# EAGLE board Vernier_Interface_Shield-Panel-v10 (EAGLE 6.5.0)
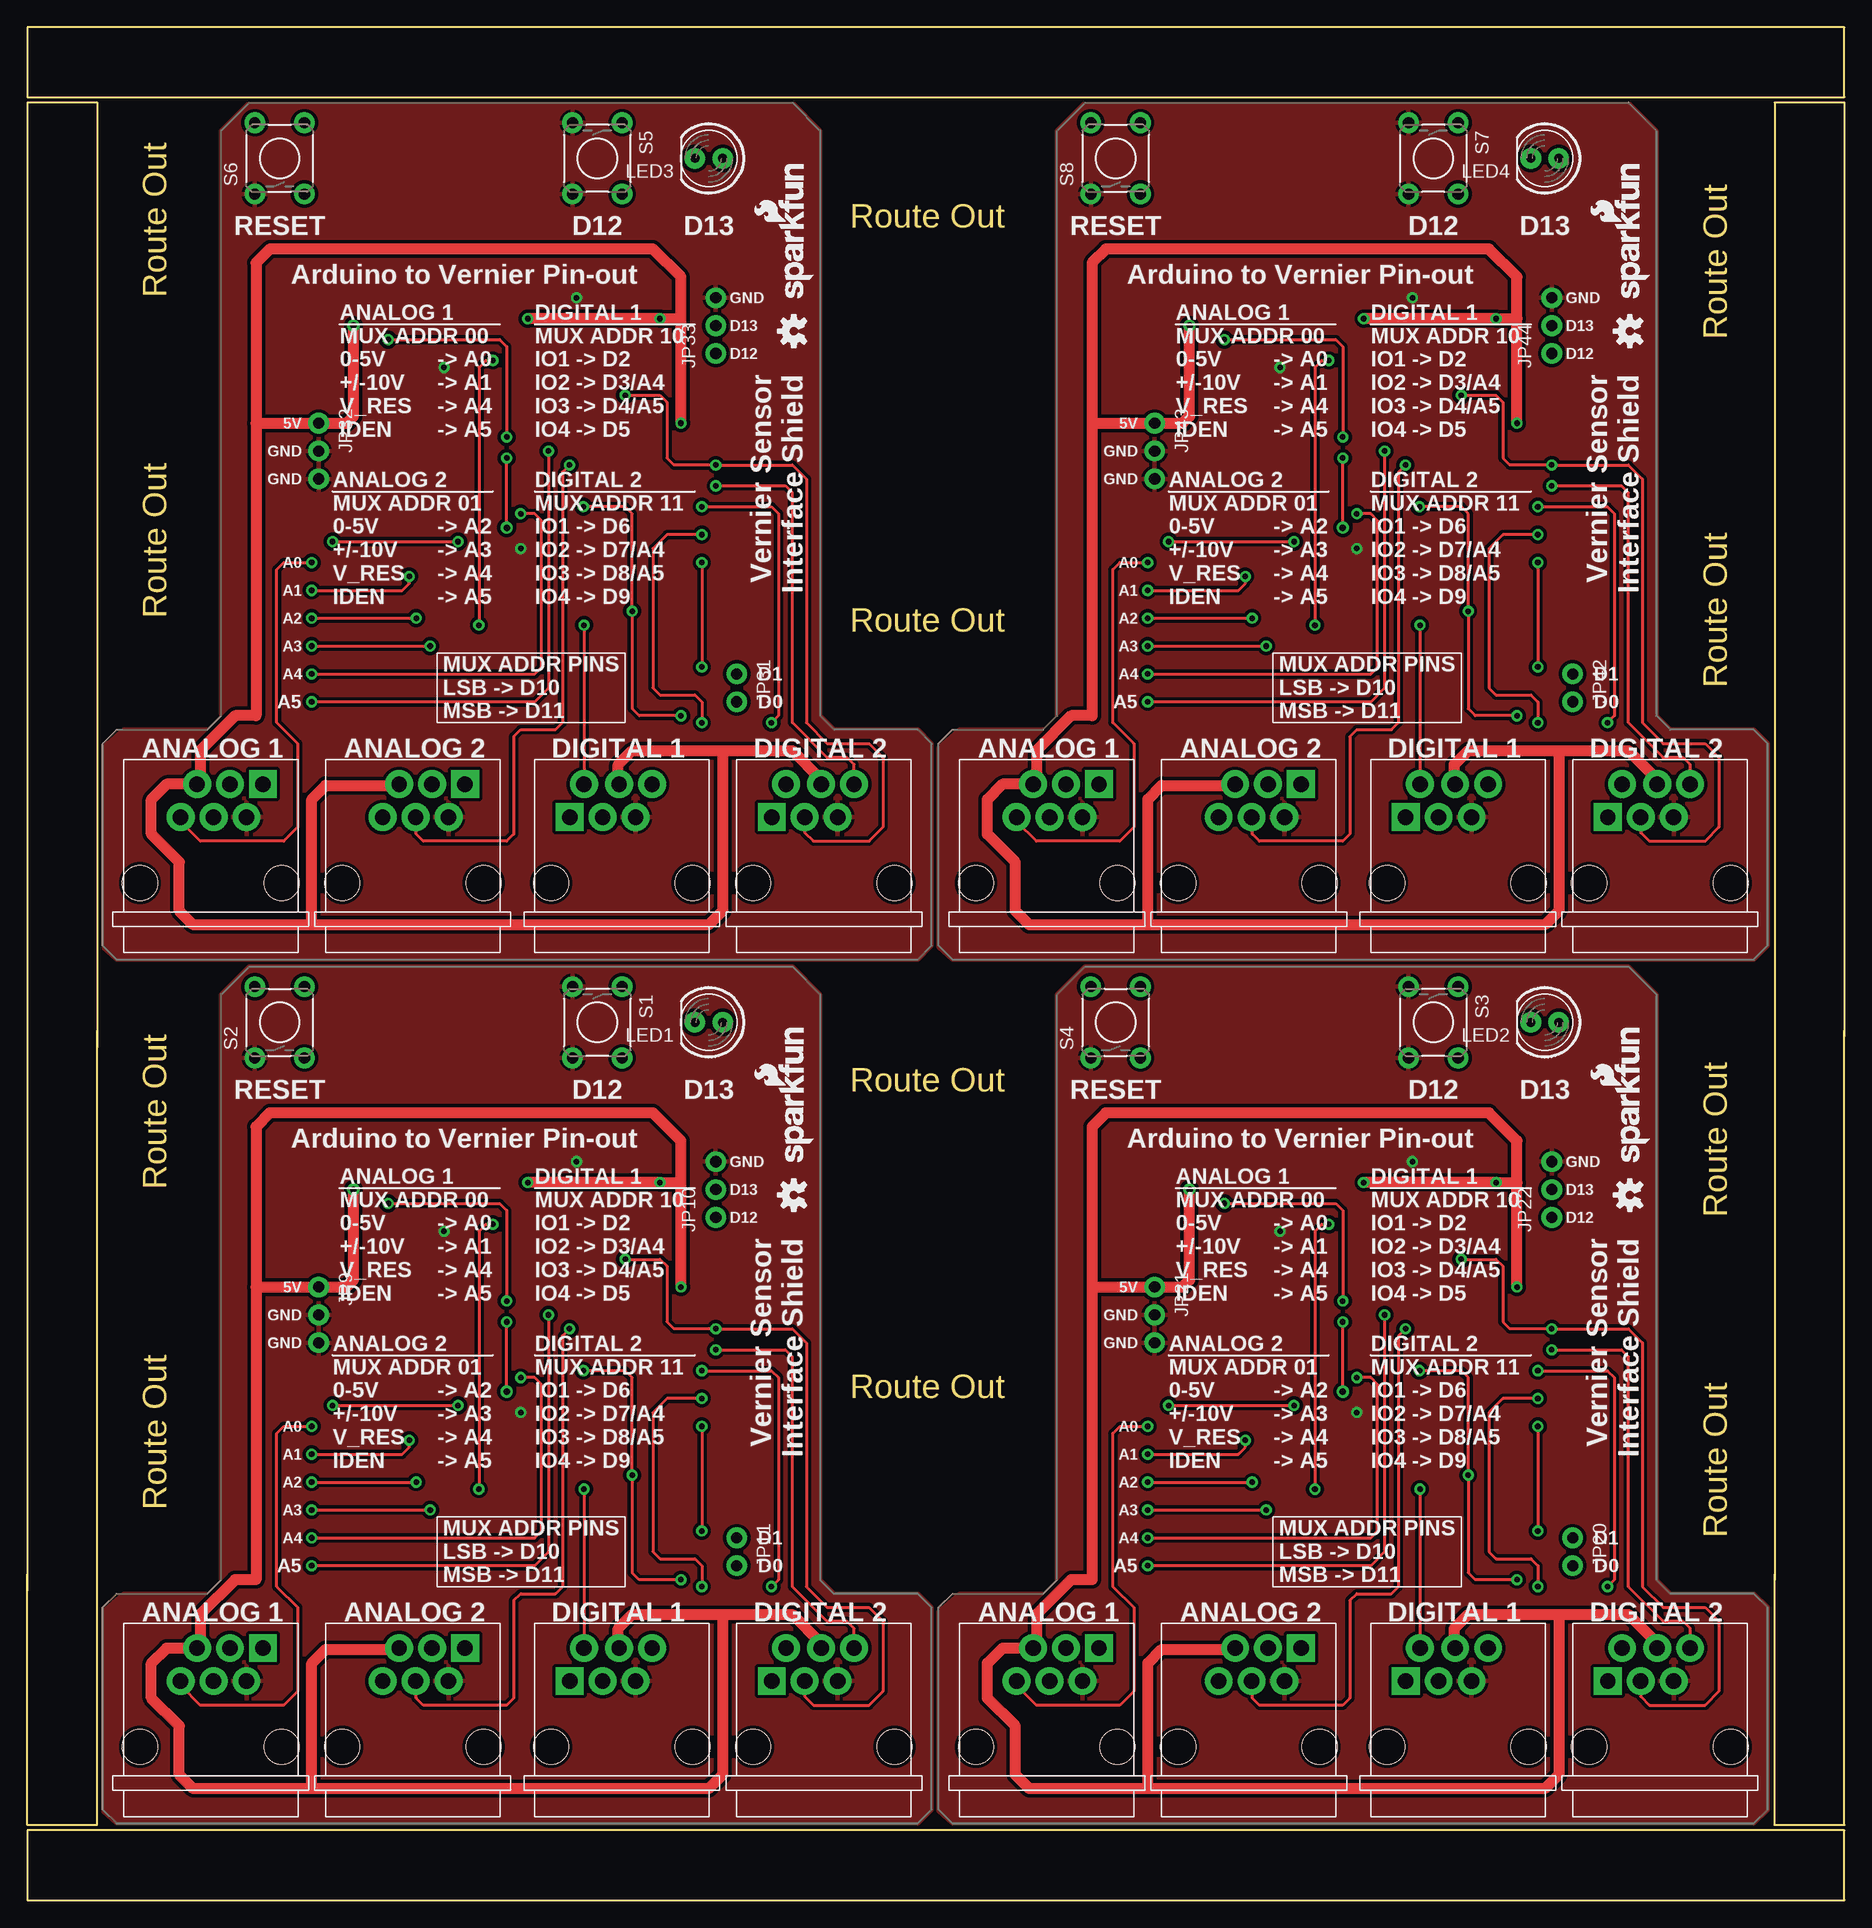
[diagram p0: board, top side]
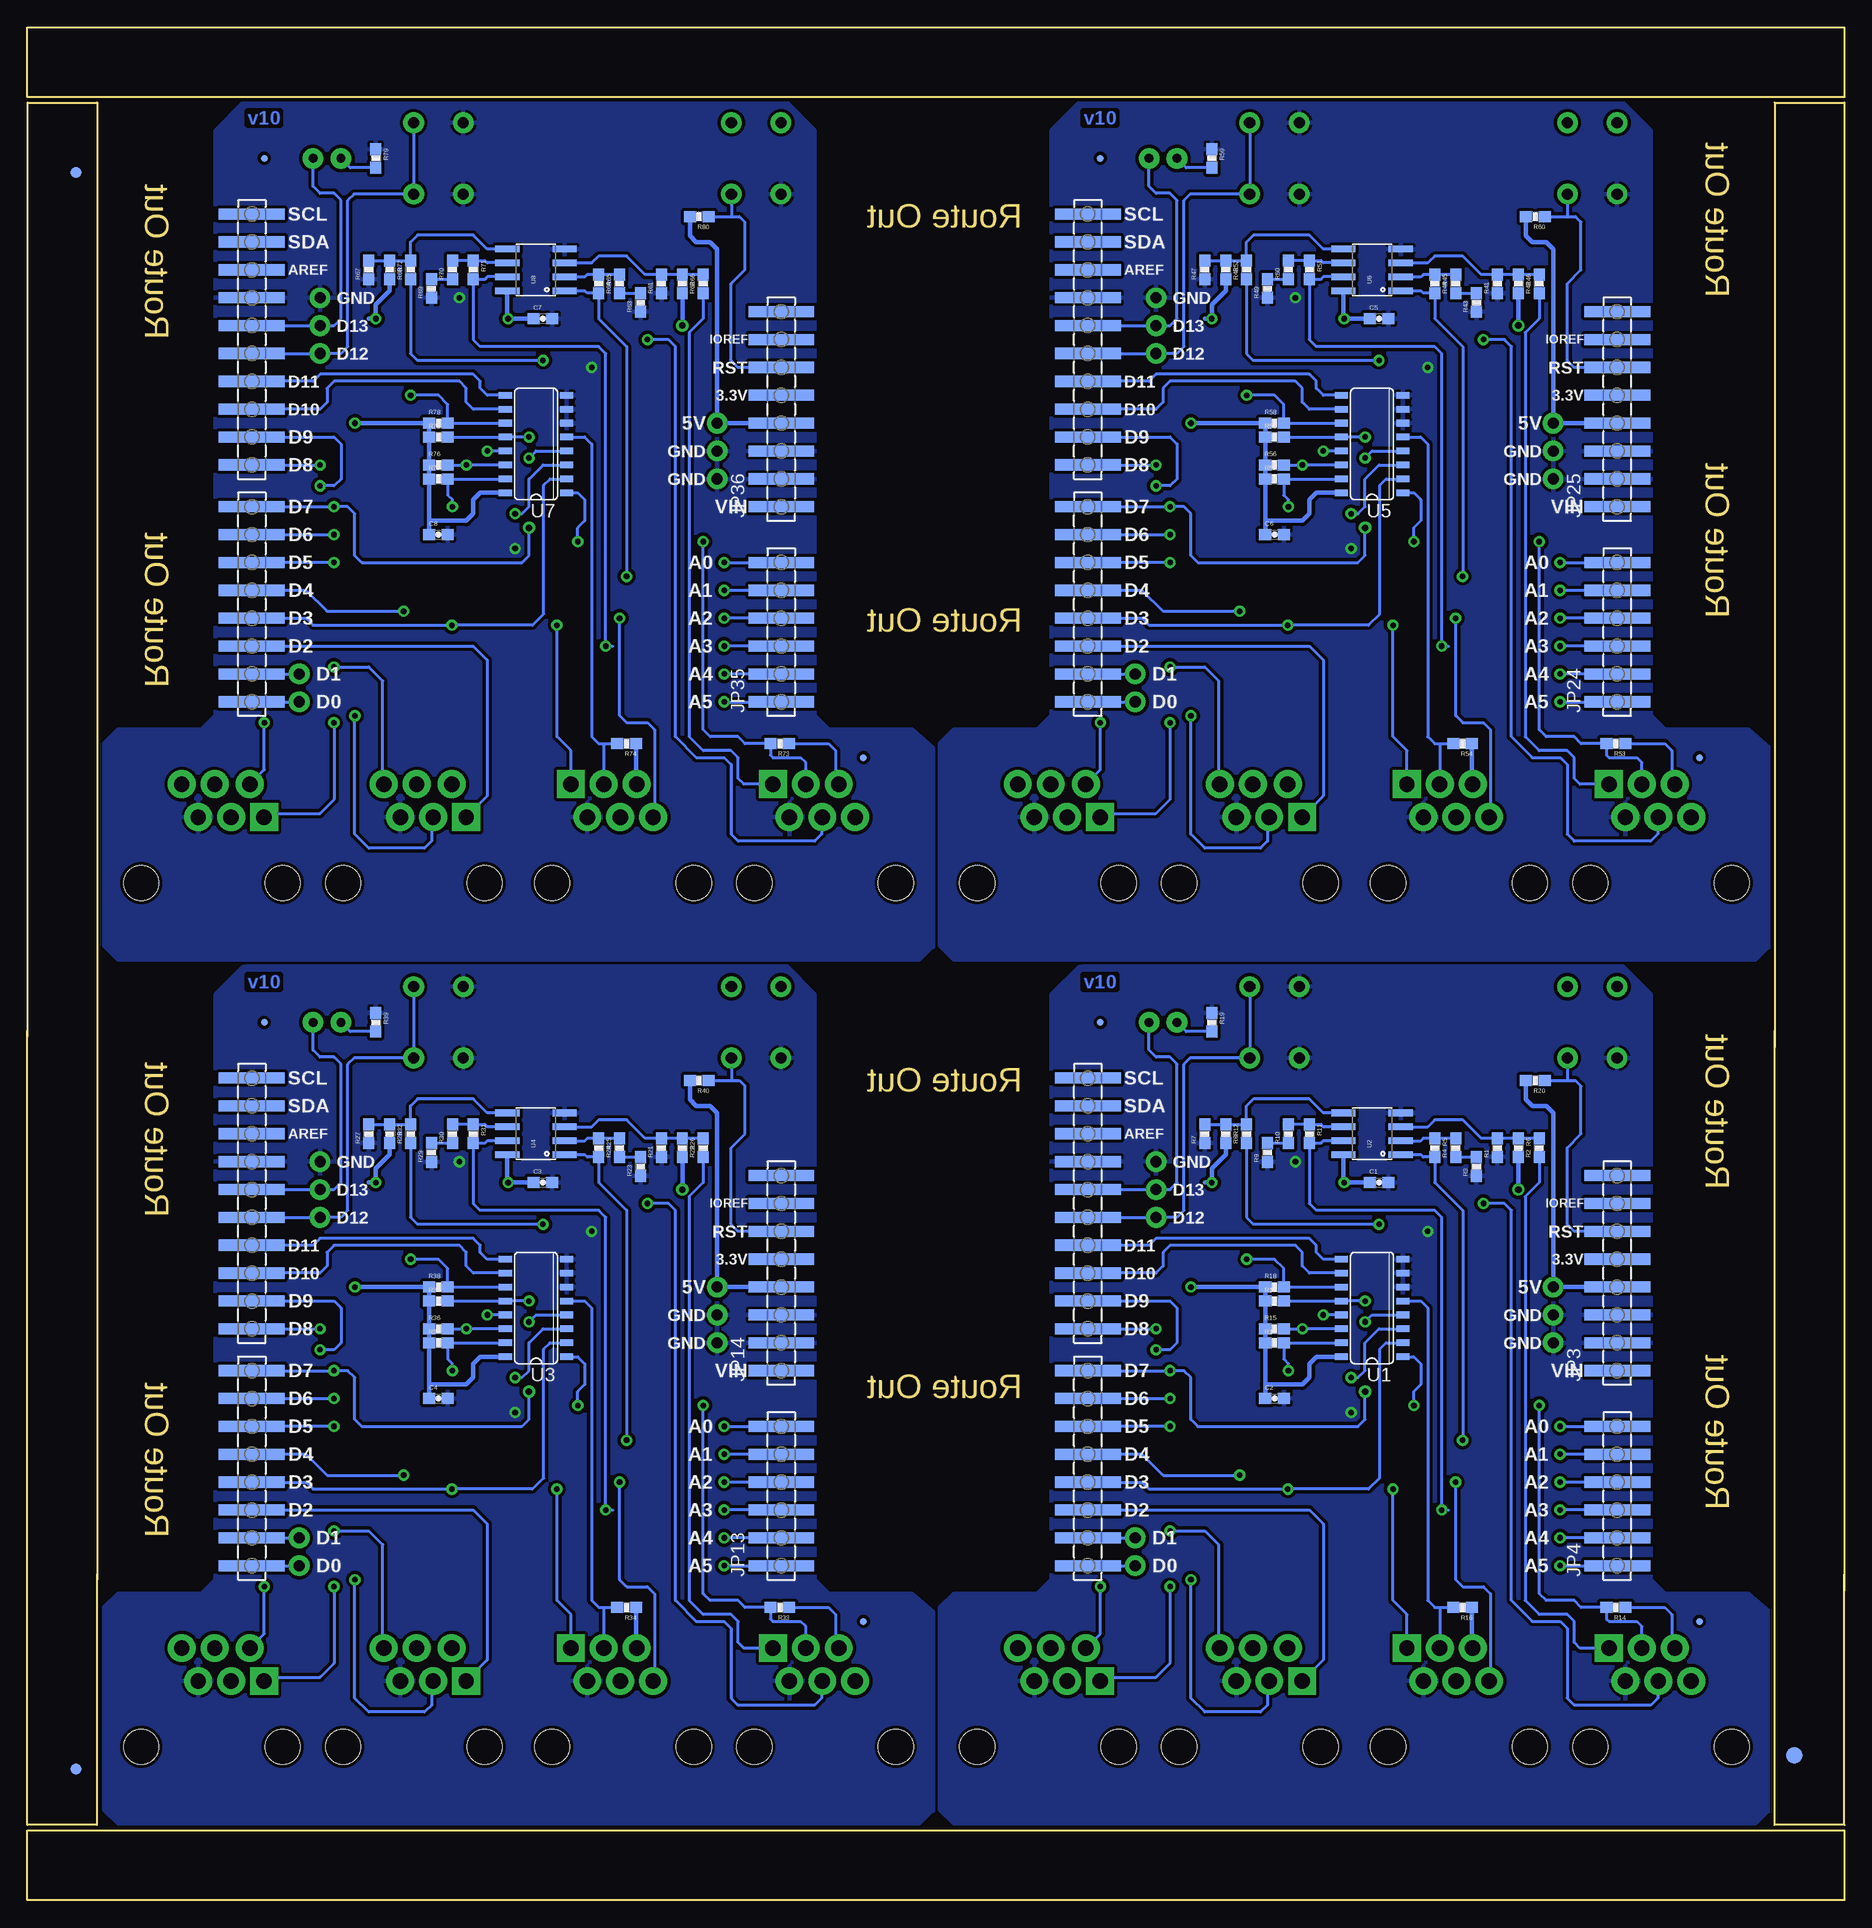
[diagram p1: board, bottom side, seen from below]

Size 165.61 x 170.69 mm. Coordinates in mm from the lower left corner, seen from the top.
Outline: 6.35,79.25 6.35,6.86 0,6.86 0,29.72
Outline: 165.61,79.25 165.61,6.86 159.26,6.86 159.26,29.72
Outline: 0,28.19 0,163.83 6.35,163.83 6.35,77.72
Outline: 159.26,29.21 159.26,163.83 165.61,163.83 165.61,78.74
Outline: 0,0 165.61,0 165.61,6.35 0,6.35 0,0
Outline: 0,164.34 165.61,164.34 165.61,170.69 0,170.69 0,164.34
Copper layers (1*16): Top 0.035mm / dielectric 1.5mm / Bottom 0.035mm
Design rules "SparkFun *": minimum track width 8mil, minimum drill 20mil, track to track 8mil, track to pad 8mil, pad to pad 8mil, via to via 8mil, smd to smd 8mil, copper to edge 8mil, drill to drill 8mil, minimum pad ring 12mil, minimum via ring 10mil, stop-mask expansion 4mil, vias tented up to drill 20mil, thermal gap 10mil

## Footprints (pad centres in the part's own frame; a part is rotated, then mirrored left to right if it is on the bottom)
0603-CAP = smd 1.1 x 1: 1 -0.85,0; 2 0.85,0
FIDUCIAL-1.5X3 = smd 1.5 x 1.5: 1 0,0
FIDUCIAL-1X2 = smd 1 x 1: 1 0,0
MICRO-FIDUCIAL = smd 0.635 x 0.635: 1 0,0
1X10_SMD_MALE = smd 1.02 x 6: 1 0,0; 2 2.54,0; 3 5.08,0; 4 7.62,0; 5 10.16,0; 6 12.7,0; 7 15.24,0; 8 17.78,0; 9 20.32,0; 10 22.86,0
1X08_SMD_MALE = smd 1.02 x 6: 1 0,0; 2 2.54,0; 3 5.08,0; 4 7.62,0; 5 10.16,0; 6 12.7,0; 7 15.24,0; 8 17.78,0
1X06_SMD_MALE = smd 1.02 x 6: 1 0,0; 2 2.54,0; 3 5.08,0; 4 7.62,0; 5 10.16,0; 6 12.7,0
BTA = drill 1.4 pad 2.54 square: 1 12.7,15.35 | drill 1.4 pad 2.54: 2 11.2,12.35; 3 9.7,15.35; 4 8.2,12.35; 5 6.7,15.35; 6 5.2,12.35 | hole 3.2: 14.4,6.35; 1.5,6.35
BTD = drill 1.4 pad 2.54 square: 1 3.2,12.35 | drill 1.4 pad 2.54: 2 4.5,15.35; 3 6.2,12.35; 4 7.7,15.35; 5 9.2,12.35; 6 10.7,15.35 | hole 3.2: 14.4,6.35; 1.5,6.35
1X03_NO_SILK = drill 1.016 pad 1.88: 1 0,0; 2 2.54,0; 3 5.08,0
1X02_NO_SILK = drill 1.016 pad 1.88: 1 0,0; 2 2.54,0
LED5MM = drill 0.813 pad 1.88: A -1.27,0; K 1.27,0
0603-RES = smd 1.1 x 1: 1 -0.85,0; 2 0.85,0
TACTILE-PTH = drill 1.016 pad 1.88: 1 -3.251,2.261; 2 3.251,2.261; 3 -3.251,-2.261; 4 3.251,-2.261
SO16 = smd 0.6 x 1.2: 1 -4.445,-2.8; 2 -3.175,-2.8; 3 -1.905,-2.8; 4 -0.635,-2.8; 5 0.635,-2.8; 6 1.905,-2.8; 7 3.175,-2.8; 8 4.445,-2.8; 9 4.445,2.8; 10 3.175,2.8; 11 1.905,2.8; 12 0.635,2.8; 13 -0.635,2.8; 14 -1.905,2.8; 15 -3.175,2.8; 16 -4.445,2.8
SO08 = smd 0.61 x 2.21: 1 -1.905,-2.616; 2 -0.635,-2.616; 3 0.635,-2.616; 4 1.905,-2.616; 5 1.905,2.616; 6 0.635,2.616; 7 -0.635,2.616; 8 -1.905,2.616

## Placement (x,y rotation side)
C1  0.1uF  [0603-CAP]  42.42,65.41 0 bottom
C2  0.1uF  [0603-CAP]  51.94,45.72 0 bottom
C3  0.1uF  [0603-CAP]  118.62,65.41 0 bottom
C4  0.1uF  [0603-CAP]  128.14,45.72 0 bottom
C5  0.1uF  [0603-CAP]  42.42,144.15 0 bottom
C6  0.1uF  [0603-CAP]  51.94,124.46 0 bottom
C7  0.1uF  [0603-CAP]  118.62,144.15 0 bottom
C8  0.1uF  [0603-CAP]  128.14,124.46 0 bottom
E$1  [FIDUCIAL-1.5X3]  4.57,13.21 90 bottom
E$4  [FIDUCIAL-1X2]  161.16,11.94 0 bottom
E$8  [FIDUCIAL-1X2]  161.16,157.48 180 bottom
FID1  FIDUCIALUFIDUCIAL  [MICRO-FIDUCIAL]  13.21,25.4 90 bottom
FID2  FIDUCIALUFIDUCIAL  [MICRO-FIDUCIAL]  67.82,80.01 0 bottom
FID3  FIDUCIALUFIDUCIAL  [MICRO-FIDUCIAL]  89.41,25.4 90 bottom
FID4  FIDUCIALUFIDUCIAL  [MICRO-FIDUCIAL]  144.02,80.01 0 bottom
FID5  FIDUCIALUFIDUCIAL  [MICRO-FIDUCIAL]  13.21,104.14 90 bottom
FID6  FIDUCIALUFIDUCIAL  [MICRO-FIDUCIAL]  67.82,158.75 0 bottom
FID7  FIDUCIALUFIDUCIAL  [MICRO-FIDUCIAL]  89.41,104.14 90 bottom
FID8  FIDUCIALUFIDUCIAL  [MICRO-FIDUCIAL]  144.02,158.75 0 bottom
JP1  Male  [1X10_SMD_MALE]  68.96,52.07 90 bottom
JP2  Male  [1X08_SMD_MALE]  68.96,30.48 90 bottom
JP3  Male  [1X08_SMD_MALE]  20.7,48.26 90 bottom
JP4  Male  [1X06_SMD_MALE]  20.7,30.48 90 bottom
JP5  BTA  [BTA]  8.76,7.62 0 top
JP6  BTA  [BTA]  27.18,7.62 0 top
JP7  BTD  [BTD]  46.23,7.62 0 top
JP8  BTD  [BTD]  64.64,7.62 0 top
JP9  [1X03_NO_SILK]  26.54,55.88 270 top
JP10  [1X03_NO_SILK]  62.74,62.23 90 top
JP11  M021X02_NO_SILK  [1X02_NO_SILK]  64.64,33.02 270 top
JP12  Male  [1X10_SMD_MALE]  145.16,52.07 90 bottom
JP13  Male  [1X06_SMD_MALE]  96.9,30.48 90 bottom
JP14  Male  [1X08_SMD_MALE]  96.9,48.26 90 bottom
JP15  Male  [1X08_SMD_MALE]  145.16,30.48 90 bottom
JP16  BTD  [BTD]  122.43,7.62 0 top
JP17  BTA  [BTA]  84.96,7.62 0 top
JP18  BTA  [BTA]  103.38,7.62 0 top
JP19  BTD  [BTD]  140.84,7.62 0 top
JP20  M021X02_NO_SILK  [1X02_NO_SILK]  140.84,33.02 270 top
JP21  [1X03_NO_SILK]  102.74,55.88 270 top
JP22  [1X03_NO_SILK]  138.94,62.23 90 top
JP23  Male  [1X10_SMD_MALE]  68.96,130.81 90 bottom
JP24  Male  [1X06_SMD_MALE]  20.7,109.22 90 bottom
JP25  Male  [1X08_SMD_MALE]  20.7,127 90 bottom
JP26  Male  [1X08_SMD_MALE]  68.96,109.22 90 bottom
JP27  BTD  [BTD]  46.23,86.36 0 top
JP28  BTA  [BTA]  8.76,86.36 0 top
JP29  BTA  [BTA]  27.18,86.36 0 top
JP30  BTD  [BTD]  64.64,86.36 0 top
JP31  M021X02_NO_SILK  [1X02_NO_SILK]  64.64,111.76 270 top
JP32  [1X03_NO_SILK]  26.54,134.62 270 top
JP33  [1X03_NO_SILK]  62.74,140.97 90 top
JP34  Male  [1X10_SMD_MALE]  145.16,130.81 90 bottom
JP35  Male  [1X06_SMD_MALE]  96.9,109.22 90 bottom
JP36  Male  [1X08_SMD_MALE]  96.9,127 90 bottom
JP37  Male  [1X08_SMD_MALE]  145.16,109.22 90 bottom
JP38  BTD  [BTD]  122.43,86.36 0 top
JP39  BTA  [BTA]  84.96,86.36 0 top
JP40  BTA  [BTA]  103.38,86.36 0 top
JP41  BTD  [BTD]  140.84,86.36 0 top
JP42  M021X02_NO_SILK  [1X02_NO_SILK]  140.84,111.76 270 top
JP43  [1X03_NO_SILK]  102.74,134.62 270 top
JP44  [1X03_NO_SILK]  138.94,140.97 90 top
LED1  [LED5MM]  62.1,80.01 180 top
LED2  [LED5MM]  138.3,80.01 180 top
LED3  [LED5MM]  62.1,158.75 180 top
LED4  [LED5MM]  138.3,158.75 180 top
LOGO1  OSHW-LOGOS  [OSHW-LOGO-S]  146.05,64.26 90 top
LOGO2  OSHW-LOGOS  [OSHW-LOGO-S]  69.85,64.26 90 top
LOGO3  OSHW-LOGOS  [OSHW-LOGO-S]  69.85,143 90 top
LOGO4  OSHW-LOGOS  [OSHW-LOGO-S]  146.05,143 90 top
LOGO_1  LOGO-SFESK  [SFE-LOGO-FLAME]  69.09,74.3 90 top
LOGO_2  LOGO-SFENW2  [SFE-NEW-WEB]  147.83,67.31 90 top
LOGO_3  LOGO-SFENW2  [SFE-NEW-WEB]  71.63,67.31 90 top
LOGO_4  LOGO-SFESK  [SFE-LOGO-FLAME]  145.29,74.3 90 top
LOGO_5  LOGO-SFENW2  [SFE-NEW-WEB]  71.63,146.05 90 top
LOGO_6  LOGO-SFESK  [SFE-LOGO-FLAME]  69.09,153.03 90 top
LOGO_7  LOGO-SFENW2  [SFE-NEW-WEB]  147.83,146.05 90 top
LOGO_8  LOGO-SFESK  [SFE-LOGO-FLAME]  145.29,153.03 90 top
R1  10K  [0603-RES]  31.62,68.58 90 bottom
R2  20k  [0603-RES]  27.81,68.58 90 bottom
R3  20k  [0603-RES]  33.53,66.88 90 bottom
R4  20k  [0603-RES]  35.43,68.58 90 bottom
R5  10K  [0603-RES]  37.34,68.58 270 bottom
R6  10K  [0603-RES]  29.72,68.58 270 bottom
R7  10K  [0603-RES]  58.29,69.85 90 bottom
R8  20k  [0603-RES]  54.48,69.85 90 bottom
R9  20k  [0603-RES]  52.58,68.15 90 bottom
R10  20k  [0603-RES]  50.67,69.85 90 bottom
R11  10K  [0603-RES]  48.77,69.85 270 bottom
R12  10K  [0603-RES]  56.39,69.85 270 bottom
R13  10K  [0603-RES]  51.94,54.61 0 bottom
R14  15K  [0603-RES]  20.83,26.67 180 bottom
R15  10K  [0603-RES]  51.94,52.07 0 bottom
R16  15K  [0603-RES]  34.8,26.67 180 bottom
R17  10K  [0603-RES]  51.94,50.8 0 bottom
R18  10K  [0603-RES]  51.94,55.88 0 bottom
R19  330  [0603-RES]  57.66,80.01 270 bottom
R20  10K  [0603-RES]  28.17,74.7 180 bottom
R21  10K  [0603-RES]  107.82,68.58 90 bottom
R22  20k  [0603-RES]  104.01,68.58 90 bottom
R23  20k  [0603-RES]  109.73,66.88 90 bottom
R24  20k  [0603-RES]  111.63,68.58 90 bottom
R25  10K  [0603-RES]  113.54,68.58 270 bottom
R26  10K  [0603-RES]  105.92,68.58 270 bottom
R27  10K  [0603-RES]  134.49,69.85 90 bottom
R28  20k  [0603-RES]  130.68,69.85 90 bottom
R29  20k  [0603-RES]  128.78,68.15 90 bottom
R30  20k  [0603-RES]  126.87,69.85 90 bottom
R31  10K  [0603-RES]  124.97,69.85 270 bottom
R32  10K  [0603-RES]  132.59,69.85 270 bottom
R33  15K  [0603-RES]  97.03,26.67 180 bottom
R34  15K  [0603-RES]  111,26.67 180 bottom
R35  10K  [0603-RES]  128.14,54.61 0 bottom
R36  10K  [0603-RES]  128.14,52.07 0 bottom
R37  10K  [0603-RES]  128.14,50.8 0 bottom
R38  10K  [0603-RES]  128.14,55.88 0 bottom
R39  330  [0603-RES]  133.86,80.01 270 bottom
R40  10K  [0603-RES]  104.37,74.7 180 bottom
R41  10K  [0603-RES]  31.62,147.32 90 bottom
R42  20k  [0603-RES]  27.81,147.32 90 bottom
R43  20k  [0603-RES]  33.53,145.62 90 bottom
R44  20k  [0603-RES]  35.43,147.32 90 bottom
R45  10K  [0603-RES]  37.34,147.32 270 bottom
R46  10K  [0603-RES]  29.72,147.32 270 bottom
R47  10K  [0603-RES]  58.29,148.59 90 bottom
R48  20k  [0603-RES]  54.48,148.59 90 bottom
R49  20k  [0603-RES]  52.58,146.89 90 bottom
R50  20k  [0603-RES]  50.67,148.59 90 bottom
R51  10K  [0603-RES]  48.77,148.59 270 bottom
R52  10K  [0603-RES]  56.39,148.59 270 bottom
R53  15K  [0603-RES]  20.83,105.41 180 bottom
R54  15K  [0603-RES]  34.8,105.41 180 bottom
R55  10K  [0603-RES]  51.94,133.35 0 bottom
R56  10K  [0603-RES]  51.94,130.81 0 bottom
R57  10K  [0603-RES]  51.94,129.54 0 bottom
R58  10K  [0603-RES]  51.94,134.62 0 bottom
R59  330  [0603-RES]  57.66,158.75 270 bottom
R60  10K  [0603-RES]  28.17,153.44 180 bottom
R61  10K  [0603-RES]  107.82,147.32 90 bottom
R62  20k  [0603-RES]  104.01,147.32 90 bottom
R63  20k  [0603-RES]  109.73,145.62 90 bottom
R64  20k  [0603-RES]  111.63,147.32 90 bottom
R65  10K  [0603-RES]  113.54,147.32 270 bottom
R66  10K  [0603-RES]  105.92,147.32 270 bottom
R67  10K  [0603-RES]  134.49,148.59 90 bottom
R68  20k  [0603-RES]  130.68,148.59 90 bottom
R69  20k  [0603-RES]  128.78,146.89 90 bottom
R70  20k  [0603-RES]  126.87,148.59 90 bottom
R71  10K  [0603-RES]  124.97,148.59 270 bottom
R72  10K  [0603-RES]  132.59,148.59 270 bottom
R73  15K  [0603-RES]  97.03,105.41 180 bottom
R74  15K  [0603-RES]  111,105.41 180 bottom
R75  10K  [0603-RES]  128.14,133.35 0 bottom
R76  10K  [0603-RES]  128.14,130.81 0 bottom
R77  10K  [0603-RES]  128.14,129.54 0 bottom
R78  10K  [0603-RES]  128.14,134.62 0 bottom
R79  330  [0603-RES]  133.86,158.75 270 bottom
R80  10K  [0603-RES]  104.37,153.44 180 bottom
S1  [TACTILE-PTH]  51.94,80.01 270 top
S2  [TACTILE-PTH]  22.99,80.01 90 top
S3  [TACTILE-PTH]  128.14,80.01 270 top
S4  [TACTILE-PTH]  99.19,80.01 90 top
S5  [TACTILE-PTH]  51.94,158.75 270 top
S6  [TACTILE-PTH]  22.99,158.75 90 top
S7  [TACTILE-PTH]  128.14,158.75 270 top
S8  [TACTILE-PTH]  99.19,158.75 90 top
U1  74HC4052SO  [SO16]  43.05,53.98 90 bottom
U2  LMV358  [SO08]  43.05,69.85 90 bottom
U3  74HC4052SO  [SO16]  119.25,53.98 90 bottom
U4  LMV358  [SO08]  119.25,69.85 90 bottom
U5  74HC4052SO  [SO16]  43.05,132.72 90 bottom
U6  LMV358  [SO08]  43.05,148.59 90 bottom
U7  74HC4052SO  [SO16]  119.25,132.72 90 bottom
U8  LMV358  [SO08]  119.25,148.59 90 bottom

## Library data of the parts
C1-C8 = SparkFun-Capacitors; PROD_ID: CAP-00810
E$1 E$4 E$8 FID1-FID8 LOGO1-LOGO4 LOGO_1-LOGO_8 = SparkFun-Aesthetics
JP1 JP12 JP23 JP34 = SparkFun-Connectors; PROD_ID: CONN-11291
JP2 JP3 JP14 JP15 JP25 JP26 JP36 JP37 = SparkFun-Connectors; PROD_ID: CONN-11292
JP4 JP13 JP24 JP35 = SparkFun-Connectors; PROD_ID: CONN-11293
JP5-JP11 JP16-JP22 JP27-JP33 JP38-JP44 = SparkFun-Connectors
LED1-LED4 = SparkFun-LED
R1 R5-R7 R11-R13 R15 R17 R18 R20 R21 R25-R27 R31 R32 R35-R38 R40 R41 R45-R47 R51 R52 R55-R58 R60 R61 R65-R67 R71 R72 R75-R78 R80 = SparkFun-Resistors; PROD_ID: RES-00824
R2-R4 R8-R10 R22-R24 R28-R30 R42-R44 R48-R50 R62-R64 R68-R70 = SparkFun-Resistors; PROD_ID: RES-09383
R14 R16 R33 R34 R53 R54 R73 R74 = SparkFun-Resistors; PROD_ID: RES-07854
R19 R39 R59 R79 = SparkFun-Resistors; PROD_ID: RES-00818
S1-S8 = SparkFun-Electromechanical
U1 U3 U5 U7 = SparkFun-AnalogIC; PROD_ID: IC-09813
U2 U4 U6 U8 = SparkFun-AnalogIC; PROD_ID: IC-09657

## Nets
0: JP2.1 JP11.2
1: JP2.2 JP11.1
2: JP12.5 JP22.1 S3.1 S3.2
3: JP15.1 JP20.2
3.3V: JP3.5
3.3V1: JP14.5
3.3V2: JP25.5
3.3V3: JP36.5
4: JP15.2 JP20.1
5: JP12.6 JP22.2 LED2.A
5V: C1.1 C2.1 JP3.4 JP5.5 JP6.5 JP7.4 JP8.4 JP9.1 R6.2 R12.2 R13.1 R14.1 R15.1 R16.1 R17.1 R18.1 R20.2 U1.16 U2.8
5V1: C3.1 C4.1 JP14.4 JP16.4 JP17.5 JP18.5 JP19.4 JP21.1 R26.2 R32.2 R33.1 R34.1 R35.1 R36.1 R37.1 R38.1 R40.2 U3.16 U4.8
5V2: C5.1 C6.1 JP25.4 JP27.4 JP28.5 JP29.5 JP30.4 JP32.1 R46.2 R52.2 R53.1 R54.1 R55.1 R56.1 R57.1 R58.1 R60.2 U5.16 U6.8
5V3: C7.1 C8.1 JP36.4 JP38.4 JP39.5 JP40.5 JP41.4 JP43.1 R66.2 R72.2 R73.1 R74.1 R75.1 R76.1 R77.1 R78.1 R80.2 U7.16 U8.8
6: JP23.5 JP33.1 S5.1 S5.2
7: JP26.1 JP31.2
8: JP26.2 JP31.1
9: JP23.6 JP33.2 LED3.A
10: JP34.5 JP44.1 S7.1 S7.2
11: JP37.1 JP42.2
12: JP1.5 JP10.1 S1.1 S1.2
13: JP1.6 JP10.2 LED1.A
14: JP37.2 JP42.1
15: JP34.6 JP44.2 LED4.A
A1: JP4.5 R5.2 U2.1
A2: JP13.2 U3.3
A3: JP4.3 R11.2 U2.7
A4: JP4.2 U1.3
A5: JP4.1 U1.13
A6: JP13.1 U3.13
A7: JP13.5 R25.2 U4.1
A8: JP13.3 R31.2 U4.7
A9: JP24.2 U5.3
A10: JP24.1 U5.13
A11: JP24.5 R45.2 U6.1
A12: JP24.3 R51.2 U6.7
A13: JP35.2 U7.3
A14: JP35.1 U7.13
A15: JP35.5 R65.2 U8.1
A16: JP35.3 R71.2 U8.7
AREF: JP1.8
AREF1: JP12.8
AREF2: JP23.8
AREF3: JP34.8
AS1_AN1: JP5.1 R2.1
AS1_AN2: JP4.6 JP5.6
AS1_AN3: JP17.1 R22.1
AS1_AN4: JP13.6 JP17.6
AS1_AN5: JP28.1 R42.1
AS1_AN6: JP24.6 JP28.6
AS1_AN7: JP39.1 R62.1
AS1_AN8: JP35.6 JP39.6
AS1_AUTOID: JP5.4 R13.2 U1.12
AS1_AUTOID1: JP17.4 R35.2 U3.12
AS1_AUTOID2: JP28.4 R55.2 U5.12
AS1_AUTOID3: JP39.4 R75.2 U7.12
AS1_VRES: JP5.3 R14.2 U1.1
AS1_VRES1: JP17.3 R33.2 U3.1
AS1_VRES2: JP28.3 R53.2 U5.1
AS1_VRES3: JP39.3 R73.2 U7.1
AS2_AN1: JP6.1 R8.1
AS2_AN2: JP4.4 JP6.6
AS2_AN3: JP13.4 JP18.6
AS2_AN4: JP18.1 R28.1
AS2_AN5: JP24.4 JP29.6
AS2_AN6: JP29.1 R48.1
AS2_AN7: JP35.4 JP40.6
AS2_AN8: JP40.1 R68.1
AS2_AUTOID: JP6.4 R15.2 U1.14
AS2_AUTOID1: JP18.4 R36.2 U3.14
AS2_AUTOID2: JP29.4 R56.2 U5.14
AS2_AUTOID3: JP40.4 R76.2 U7.14
AS2_VRES: JP6.3 R16.2 U1.5
AS2_VRES1: JP18.3 R34.2 U3.5
AS2_VRES2: JP29.3 R54.2 U5.5
AS2_VRES3: JP40.3 R74.2 U7.5
D1_IO1: JP2.3 JP7.1
D1_IO2: JP2.4 JP7.2 U1.2
D1_IO3: JP2.5 JP7.3 R17.2 U1.15
D1_IO4: JP2.6 JP7.6
D1_IO5: JP15.6 JP16.6
D1_IO6: JP15.5 JP16.3 R37.2 U3.15
D1_IO7: JP15.4 JP16.2 U3.2
D1_IO8: JP15.3 JP16.1
D1_IO9: JP26.6 JP27.6
D1_IO10: JP26.5 JP27.3 R57.2 U5.15
D1_IO11: JP26.4 JP27.2 U5.2
D1_IO12: JP26.3 JP27.1
D1_IO13: JP37.6 JP38.6
D1_IO14: JP37.5 JP38.3 R77.2 U7.15
D1_IO15: JP37.4 JP38.2 U7.2
D1_IO16: JP37.3 JP38.1
D2_IO1: JP2.7 JP8.1
D2_IO2: JP2.8 JP8.2 U1.4
D2_IO3: JP1.1 JP8.3 R18.2 U1.11
D2_IO4: JP1.2 JP8.6
D2_IO5: JP12.2 JP19.6
D2_IO6: JP12.1 JP19.3 R38.2 U3.11
D2_IO7: JP15.8 JP19.2 U3.4
D2_IO8: JP15.7 JP19.1
D2_IO9: JP23.2 JP30.6
D2_IO10: JP23.1 JP30.3 R58.2 U5.11
D2_IO11: JP26.8 JP30.2 U5.4
D2_IO12: JP26.7 JP30.1
D2_IO13: JP34.2 JP41.6
D2_IO14: JP34.1 JP41.3 R78.2 U7.11
D2_IO15: JP37.8 JP41.2 U7.4
D2_IO16: JP37.7 JP41.1
GND: C1.2 C2.2 JP1.7 JP3.2 JP3.3 JP5.2 JP6.2 JP7.5 JP8.5 JP9.2 JP9.3 JP10.3 R1.1 R3.1 R7.1 R9.1 R19.1 S1.3 S1.4 S2.1 U1.6 U1.7 U1.8 U2.4
GND1: C3.2 C4.2 JP12.7 JP14.2 JP14.3 JP16.5 JP17.2 JP18.2 JP19.5 JP21.2 JP21.3 JP22.3 R21.1 R23.1 R27.1 R29.1 R39.1 S3.3 S3.4 S4.1 U3.6 U3.7 U3.8 U4.4
GND2: C5.2 C6.2 JP23.7 JP25.2 JP25.3 JP27.5 JP28.2 JP29.2 JP30.5 JP32.2 JP32.3 JP33.3 R41.1 R43.1 R47.1 R49.1 R59.1 S5.3 S5.4 S6.1 U5.6 U5.7 U5.8 U6.4
GND3: C7.2 C8.2 JP34.7 JP36.2 JP36.3 JP38.5 JP39.2 JP40.2 JP41.5 JP43.2 JP43.3 JP44.3 R61.1 R63.1 R67.1 R69.1 R79.1 S7.3 S7.4 S8.1 U7.6 U7.7 U7.8 U8.4
IOREF: JP3.7
IOREF1: JP14.7
IOREF2: JP25.7
IOREF3: JP36.7
MUX_A0: JP1.3 U1.10
MUX_A1: JP1.4 U1.9
MUX_A2: JP12.3 U3.10
MUX_A3: JP12.4 U3.9
MUX_A4: JP23.3 U5.10
MUX_A5: JP23.4 U5.9
MUX_A6: JP34.3 U7.10
MUX_A7: JP34.4 U7.9
N$1: R1.2 R2.2 R6.1 U2.3
N$2: R3.2 R4.1
N$3: R4.2 R5.1 U2.2
N$4: R23.2 R24.1
N$5: R9.2 R10.1
N$6: R7.2 R8.2 R12.1 U2.5
N$8: R10.2 R11.1 U2.6
N$9: LED1.K R19.2
N$24: R21.2 R22.2 R26.1 U4.3
N$25: R24.2 R25.1 U4.2
N$26: R29.2 R30.1
N$28: R27.2 R28.2 R32.1 U4.5
N$29: R30.2 R31.1 U4.6
N$30: LED2.K R39.2
N$31: R43.2 R44.1
N$32: R41.2 R42.2 R46.1 U6.3
N$33: R44.2 R45.1 U6.2
N$34: R49.2 R50.1
N$35: R47.2 R48.2 R52.1 U6.5
N$36: R50.2 R51.1 U6.6
N$37: LED3.K R59.2
N$38: R63.2 R64.1
N$39: R61.2 R62.2 R66.1 U8.3
N$40: R64.2 R65.1 U8.2
N$41: R69.2 R70.1
N$42: R67.2 R68.2 R72.1 U8.5
N$43: R70.2 R71.1 U8.6
N$44: LED4.K R79.2
RESET: JP3.6 R20.1 S2.3
RESET1: JP14.6 R40.1 S4.3
RESET2: JP25.6 R60.1 S6.3
RESET3: JP36.6 R80.1 S8.3
SCL: JP1.10
SCL1: JP12.10
SCL2: JP23.10
SCL3: JP34.10
SDA: JP1.9
SDA1: JP12.9
SDA2: JP23.9
SDA3: JP34.9
VIN: JP3.1
VIN1: JP14.1
VIN2: JP25.1
VIN3: JP36.1

## Tracks (layer width: path | path; a pad name or v marks a point on that pad's centre or on a via)
0
  Bottom 0.254: JP2.1 JP11.2
1
  Bottom 0.254: JP2.2 JP11.1
2
  Bottom 0.254: S3.1 S3.2 135.84,76.76 136.4,76.2 136.4,62.87 137.03,62.23 JP22.1 JP12.5
3
  Bottom 0.254: JP15.1 JP20.2
4
  Bottom 0.254: JP15.2 JP20.1
5
  Bottom 0.254: JP12.6 JP22.2 137.67,64.77 137.03,65.41 137.03,76.2 137.67,76.83 138.94,76.83 139.57,77.47 LED2.A
5V  (via drill 0.51, 0.6)
  Top 1.016: 25.91,10.16 62.1,10.16 63.37,11.43 63.37,26.04 | 25.91,10.16 15.11,10.16 13.84,11.43 13.84,15.88 11.3,18.41 11.3,21.59 12.68,22.97 JP5.5 15.75,23.25 15.75,26.04 18.92,29.21 20.83,29.21 20.83,55.88 | 25.91,10.16 25.91,21.59 27.18,22.86 33.77,22.86 JP6.5 | v29.72,64.77 29.72,56.52 29.08,55.88 JP9.1 20.83,55.88 | 20.83,55.88 20.83,70.48 22.1,71.75 57.02,71.75 59.56,69.22 59.56,65.41 | v45.59,65.41 v57.66,65.41 59.56,65.41 | v59.56,55.88 59.56,65.41 | JP8.4 72.34,23.41 69.72,26.04 63.37,26.04 | JP7.4 53.85,23.05 53.85,24.77 55.12,26.04 63.37,26.04
  Bottom 0.254: JP6.5 33.95,23.04 | R14.1 16.38,26.67 15.75,26.04 15.75,23.25 JP5.5
  Bottom 0.406: 52.79,46.99 R17.1 R15.1 R13.1 R18.1 v59.56,55.88 | 52.79,46.99 C2.1 | U1.16 48.13,49.53 48.77,48.9 48.77,47.62 49.4,46.99 52.79,46.99 | 33.95,23.04 R16.1 | R6.2 v29.72,64.77 | C1.1 v45.59,65.41 45.67,65.48 U2.8 | JP3.4 JP9.1 26.54,71.75 27.18,72.39 28.45,72.39 29.02,72.97 R20.2 | 58.29,65.41 v57.66,65.41 57.66,66.67 56.39,67.94 R12.2
5V1  (via drill 0.51, 0.6)
  Top 1.016: 102.11,10.16 138.3,10.16 139.57,11.43 139.57,26.04 | 102.11,10.16 91.31,10.16 90.04,11.43 90.04,15.88 87.5,18.41 87.5,21.59 88.88,22.97 JP17.5 91.95,23.25 91.95,26.04 95.12,29.21 97.03,29.21 97.03,55.88 | 102.11,10.16 102.11,21.59 103.38,22.86 109.97,22.86 JP18.5 | v105.92,64.77 105.92,56.52 105.28,55.88 JP21.1 97.03,55.88 | 97.03,55.88 97.03,70.48 98.3,71.75 133.22,71.75 135.76,69.22 135.76,65.41 | v121.79,65.41 v133.86,65.41 135.76,65.41 | v135.76,55.88 135.76,65.41 | JP19.4 148.54,23.41 145.92,26.04 139.57,26.04 | JP16.4 130.05,23.05 130.05,24.77 131.32,26.04 139.57,26.04
  Bottom 0.254: JP18.5 110.15,23.04 | R33.1 92.58,26.67 91.95,26.04 91.95,23.25 JP17.5
  Bottom 0.406: 128.99,46.99 R37.1 R36.1 R35.1 R38.1 v135.76,55.88 | 128.99,46.99 C4.1 | U3.16 124.33,49.53 124.97,48.9 124.97,47.62 125.6,46.99 128.99,46.99 | 110.15,23.04 R34.1 | R26.2 v105.92,64.77 | C3.1 v121.79,65.41 121.87,65.48 U4.8 | JP14.4 JP21.1 102.74,71.75 103.38,72.39 104.65,72.39 105.22,72.97 R40.2 | 134.49,65.41 v133.86,65.41 133.86,66.67 132.59,67.94 R32.2
5V2  (via drill 0.51, 0.6)
  Top 1.016: 25.91,88.9 62.1,88.9 63.37,90.17 63.37,104.78 | 25.91,88.9 15.11,88.9 13.84,90.17 13.84,94.61 11.3,97.16 11.3,100.33 12.68,101.71 JP28.5 15.75,102 15.75,104.78 18.92,107.95 20.83,107.95 20.83,134.62 | 25.91,88.9 25.91,100.33 27.18,101.6 33.77,101.6 JP29.5 | v29.72,143.51 29.72,135.25 29.08,134.62 JP32.1 20.83,134.62 | 20.83,134.62 20.83,149.22 22.1,150.5 57.02,150.5 59.56,147.96 59.56,144.15 | v45.59,144.15 v57.66,144.15 59.56,144.15 | v59.56,134.62 59.56,144.15 | JP30.4 72.34,102.16 69.72,104.78 63.37,104.78 | JP27.4 53.85,101.79 53.85,103.5 55.12,104.78 63.37,104.78
  Bottom 0.254: JP29.5 33.95,101.78 | R53.1 16.38,105.41 15.75,104.78 15.75,102 JP28.5
  Bottom 0.406: 52.79,125.73 R57.1 R56.1 R55.1 R58.1 v59.56,134.62 | 52.79,125.73 C6.1 | U5.16 48.13,128.27 48.77,127.64 48.77,126.36 49.4,125.73 52.79,125.73 | 33.95,101.78 R54.1 | R46.2 v29.72,143.51 | C5.1 v45.59,144.15 45.67,144.22 U6.8 | JP25.4 JP32.1 26.54,150.5 27.18,151.13 28.45,151.13 29.02,151.71 R60.2 | 58.29,144.15 v57.66,144.15 57.66,145.41 56.39,146.69 R52.2
5V3  (via drill 0.51, 0.6)
  Top 1.016: 102.11,88.9 138.3,88.9 139.57,90.17 139.57,104.78 | 102.11,88.9 91.31,88.9 90.04,90.17 90.04,94.61 87.5,97.16 87.5,100.33 88.88,101.71 JP39.5 91.95,102 91.95,104.78 95.12,107.95 97.03,107.95 97.03,134.62 | 102.11,88.9 102.11,100.33 103.38,101.6 109.97,101.6 JP40.5 | v105.92,143.51 105.92,135.25 105.28,134.62 JP43.1 97.03,134.62 | 97.03,134.62 97.03,149.22 98.3,150.5 133.22,150.5 135.76,147.96 135.76,144.15 | v121.79,144.15 v133.86,144.15 135.76,144.15 | v135.76,134.62 135.76,144.15 | JP41.4 148.54,102.16 145.92,104.78 139.57,104.78 | JP38.4 130.05,101.79 130.05,103.5 131.32,104.78 139.57,104.78
  Bottom 0.254: JP40.5 110.15,101.78 | R73.1 92.58,105.41 91.95,104.78 91.95,102 JP39.5
  Bottom 0.406: 128.99,125.73 R77.1 R76.1 R75.1 R78.1 v135.76,134.62 | 128.99,125.73 C8.1 | U7.16 124.33,128.27 124.97,127.64 124.97,126.36 125.6,125.73 128.99,125.73 | 110.15,101.78 R74.1 | R66.2 v105.92,143.51 | C7.1 v121.79,144.15 121.87,144.22 U8.8 | JP36.4 JP43.1 102.74,150.5 103.38,151.13 104.65,151.13 105.22,151.71 R80.2 | 134.49,144.15 v133.86,144.15 133.86,145.41 132.59,146.69 R72.2
6
  Bottom 0.254: S5.1 S5.2 59.64,155.5 60.2,154.94 60.2,141.6 60.83,140.97 JP33.1 JP23.5
7
  Bottom 0.254: JP26.1 JP31.2
8
  Bottom 0.254: JP26.2 JP31.1
9
  Bottom 0.254: JP23.6 JP33.2 61.47,143.51 60.83,144.15 60.83,154.94 61.47,155.57 62.74,155.57 63.37,156.21 LED3.A
10
  Bottom 0.254: S7.1 S7.2 135.84,155.5 136.4,154.94 136.4,141.6 137.03,140.97 JP44.1 JP34.5
11
  Bottom 0.254: JP37.1 JP42.2
12
  Bottom 0.254: S1.1 S1.2 59.64,76.76 60.2,76.2 60.2,62.87 60.83,62.23 JP10.1 JP1.5
13
  Bottom 0.254: JP1.6 JP10.2 61.47,64.77 60.83,65.41 60.83,76.2 61.47,76.83 62.74,76.83 63.37,77.47 LED1.A
14
  Bottom 0.254: JP37.2 JP42.1
15
  Bottom 0.254: JP34.6 JP44.2 137.67,143.51 137.03,144.15 137.03,154.94 137.67,155.57 138.94,155.57 139.57,156.21 LED4.A
A1  (via drill 0.51)
  Top 0.254: v25.91,40.64 34.16,40.64 34.8,41.27 v34.8,41.91
  Bottom 0.254: v34.8,41.91 34.8,62.87 37.34,65.41 R5.2 38.39,67.73 38.61,67.94 U2.1 | JP4.5 v25.91,40.64
A2  (via drill 0.51)
  Top 0.254: v102.11,33.02 122.43,33.02 123.06,33.66 123.06,46.99 122.43,47.62 v121.16,47.62
  Bottom 0.254: JP13.2 v102.11,33.02 | v121.16,47.62 120.52,47.62 119.89,48.26 119.89,50.8 118.62,52.07 U3.3
A3  (via drill 0.51)
  Top 0.254: v25.91,35.56 v36.7,35.56
  Bottom 0.254: U2.7 47.5,69.22 47.71,69 R11.2 48.77,63.5 48.13,62.87 37.34,62.87 36.7,62.23 v36.7,35.56 36.07,35.56 | JP4.3 v25.91,35.56
A4  (via drill 0.51)
  Top 0.254: v25.91,33.02 46.23,33.02 46.86,33.66 46.86,46.99 46.23,47.62 v44.96,47.62
  Bottom 0.254: JP4.2 v25.91,33.02 | v44.96,47.62 44.32,47.62 43.69,48.26 43.69,50.8 42.42,52.07 U1.3
A5  (via drill 0.51)
  Top 0.254: v47.5,53.34 47.5,31.75 46.23,30.48 v25.91,30.48
  Bottom 0.254: U1.13 v47.5,53.34 | v25.91,30.48 JP4.1
A6  (via drill 0.51)
  Top 0.254: v123.7,53.34 123.7,31.75 122.43,30.48 v102.11,30.48
  Bottom 0.254: U3.13 v123.7,53.34 | v102.11,30.48 JP13.1
A7  (via drill 0.51)
  Top 0.254: v102.11,40.64 110.36,40.64 111,41.27 v111,41.91
  Bottom 0.254: v111,41.91 111,62.87 113.54,65.41 R25.2 114.59,67.73 114.81,67.94 U4.1 | JP13.5 v102.11,40.64
A8  (via drill 0.51)
  Top 0.254: v102.11,35.56 v112.9,35.56
  Bottom 0.254: U4.7 123.7,69.22 123.91,69 R31.2 124.97,63.5 124.33,62.87 113.54,62.87 112.9,62.23 v112.9,35.56 112.27,35.56 | JP13.3 v102.11,35.56
A9  (via drill 0.51)
  Top 0.254: v25.91,111.76 46.23,111.76 46.86,112.39 46.86,125.73 46.23,126.36 v44.96,126.36
  Bottom 0.254: JP24.2 v25.91,111.76 | v44.96,126.36 44.32,126.36 43.69,127 43.69,129.54 42.42,130.81 U5.3
A10  (via drill 0.51)
  Top 0.254: v47.5,132.08 47.5,110.49 46.23,109.22 v25.91,109.22
  Bottom 0.254: U5.13 v47.5,132.08 | v25.91,109.22 JP24.1
A11  (via drill 0.51)
  Top 0.254: v25.91,119.38 34.16,119.38 34.8,120.02 v34.8,120.65
  Bottom 0.254: v34.8,120.65 34.8,141.6 37.34,144.15 R45.2 38.39,146.47 38.61,146.69 U6.1 | JP24.5 v25.91,119.38
A12  (via drill 0.51)
  Top 0.254: v25.91,114.3 v36.7,114.3
  Bottom 0.254: U6.7 47.5,147.96 47.71,147.74 R51.2 48.77,142.24 48.13,141.6 37.34,141.6 36.7,140.97 v36.7,114.3 36.07,114.3 | JP24.3 v25.91,114.3
A13  (via drill 0.51)
  Top 0.254: v102.11,111.76 122.43,111.76 123.06,112.39 123.06,125.73 122.43,126.36 v121.16,126.36
  Bottom 0.254: JP35.2 v102.11,111.76 | v121.16,126.36 120.52,126.36 119.89,127 119.89,129.54 118.62,130.81 U7.3
A14  (via drill 0.51)
  Top 0.254: v123.7,132.08 123.7,110.49 122.43,109.22 v102.11,109.22
  Bottom 0.254: U7.13 v123.7,132.08 | v102.11,109.22 JP35.1
A15  (via drill 0.51)
  Top 0.254: v102.11,119.38 110.36,119.38 111,120.02 v111,120.65
  Bottom 0.254: v111,120.65 111,141.6 113.54,144.15 R65.2 114.59,146.47 114.81,146.69 U8.1 | JP35.5 v102.11,119.38
A16  (via drill 0.51)
  Top 0.254: v102.11,114.3 v112.9,114.3
  Bottom 0.254: U8.7 123.7,147.96 123.91,147.74 R71.2 124.97,142.24 124.33,141.6 113.54,141.6 112.9,140.97 v112.9,114.3 112.27,114.3 | JP35.3 v102.11,114.3
AS1_AN1
  Bottom 0.254: R2.1 27.81,65.41 29.08,64.14 29.08,27.3 27.81,26.04 25.27,26.04 24.64,25.4 24.64,23.5 24.11,22.97 JP5.1
AS1_AN2  (via drill 0.51)
  Top 0.254: v25.91,43.18 23.37,43.18 22.73,42.55 22.73,28.57 24.64,26.67 24.64,19.05 23.37,17.78 15.75,17.78 13.96,19.57 JP5.6
  Bottom 0.254: v25.91,43.18 JP4.6
AS1_AN3
  Bottom 0.254: R22.1 104.01,65.41 105.28,64.14 105.28,27.3 104.01,26.04 101.47,26.04 100.84,25.4 100.84,23.5 100.31,22.97 JP17.1
AS1_AN4  (via drill 0.51)
  Top 0.254: v102.11,43.18 99.57,43.18 98.93,42.55 98.93,28.57 100.84,26.67 100.84,19.05 99.57,17.78 91.95,17.78 90.16,19.57 JP17.6
  Bottom 0.254: v102.11,43.18 JP13.6
AS1_AN5
  Bottom 0.254: R42.1 27.81,144.15 29.08,142.88 29.08,106.05 27.81,104.78 25.27,104.78 24.64,104.14 24.64,102.23 24.11,101.71 JP28.1
AS1_AN6  (via drill 0.51)
  Top 0.254: v25.91,121.92 23.37,121.92 22.73,121.28 22.73,107.31 24.64,105.41 24.64,97.79 23.37,96.52 15.75,96.52 13.96,98.31 JP28.6
  Bottom 0.254: v25.91,121.92 JP24.6
AS1_AN7
  Bottom 0.254: R62.1 104.01,144.15 105.28,142.88 105.28,106.05 104.01,104.78 101.47,104.78 100.84,104.14 100.84,102.23 100.31,101.71 JP39.1
AS1_AN8  (via drill 0.51)
  Top 0.254: v102.11,121.92 99.57,121.92 98.93,121.28 98.93,107.31 100.84,105.41 100.84,97.79 99.57,96.52 91.95,96.52 90.16,98.31 JP39.6
  Bottom 0.254: v102.11,121.92 JP35.6
AS1_AUTOID  (via drill 0.51)
  Top 0.254: v32.89,63.5 43.05,63.5 43.69,62.87 v43.69,54.61
  Bottom 0.254: R13.2 U1.12 v43.69,54.61 | JP5.4 17.02,19.91 17.02,18.41 17.65,17.78 24.64,17.78 25.27,18.41 25.27,24.77 25.91,25.4 28.45,25.4 30.35,27.3 30.35,62.87 30.99,63.5 v32.89,63.5
AS1_AUTOID1  (via drill 0.51)
  Top 0.254: v109.09,63.5 119.25,63.5 119.89,62.87 v119.89,54.61
  Bottom 0.254: R35.2 U3.12 v119.89,54.61 | JP17.4 93.22,19.91 93.22,18.41 93.85,17.78 100.84,17.78 101.47,18.41 101.47,24.77 102.11,25.4 104.65,25.4 106.55,27.3 106.55,62.87 107.19,63.5 v109.09,63.5
AS1_AUTOID2  (via drill 0.51)
  Top 0.254: v32.89,142.24 43.05,142.24 43.69,141.6 v43.69,133.35
  Bottom 0.254: R55.2 U5.12 v43.69,133.35 | JP28.4 17.02,98.66 17.02,97.16 17.65,96.52 24.64,96.52 25.27,97.16 25.27,103.5 25.91,104.14 28.45,104.14 30.35,106.05 30.35,141.6 30.99,142.24 v32.89,142.24
AS1_AUTOID3  (via drill 0.51)
  Top 0.254: v109.09,142.24 119.25,142.24 119.89,141.6 v119.89,133.35
  Bottom 0.254: R75.2 U7.12 v119.89,133.35 | JP39.4 93.22,98.66 93.22,97.16 93.85,96.52 100.84,96.52 101.47,97.16 101.47,103.5 102.11,104.14 104.65,104.14 106.55,106.05 106.55,141.6 107.19,142.24 v109.09,142.24
AS1_VRES  (via drill 0.51)
  Top 0.254: v27.81,45.09 v39.24,45.09
  Bottom 0.254: JP5.3 18.46,24.94 18.92,25.4 21.46,25.4 21.68,25.61 R14.2 24,26.67 24.64,27.3 27.18,27.3 27.81,27.94 v27.81,45.09 | v39.24,45.09 39.24,46.35 38.61,46.99 38.61,48.9 39.24,49.53 U1.1
AS1_VRES1  (via drill 0.51)
  Top 0.254: v104.01,45.09 v115.44,45.09
  Bottom 0.254: JP17.3 94.66,24.94 95.12,25.4 97.66,25.4 97.88,25.61 R33.2 100.2,26.67 100.84,27.3 103.38,27.3 104.01,27.94 v104.01,45.09 | v115.44,45.09 115.44,46.35 114.81,46.99 114.81,48.9 115.44,49.53 U3.1
AS1_VRES2  (via drill 0.51)
  Top 0.254: v27.81,123.83 v39.24,123.83
  Bottom 0.254: JP28.3 18.46,103.68 18.92,104.14 21.46,104.14 21.68,104.36 R53.2 24,105.41 24.64,106.05 27.18,106.05 27.81,106.68 v27.81,123.83 | v39.24,123.83 39.24,125.09 38.61,125.73 38.61,127.64 39.24,128.27 U5.1
AS1_VRES3  (via drill 0.51)
  Top 0.254: v104.01,123.83 v115.44,123.83
  Bottom 0.254: JP39.3 94.66,103.68 95.12,104.14 97.66,104.14 97.88,104.36 R73.2 100.2,105.41 100.84,106.05 103.38,106.05 104.01,106.68 v104.01,123.83 | v115.44,123.83 115.44,125.09 114.81,125.73 114.81,127.64 115.44,128.27 U7.1
AS2_AN1  (via drill 0.51)
  Top 0.254: v41.15,37.47 41.15,60.96 41.78,61.59 v42.42,61.59
  Bottom 0.254: v42.42,61.59 53.85,61.59 54.48,62.23 R8.1 | JP6.1 39.88,26.04 41.15,27.3 v41.15,37.47
AS2_AN2  (via drill 0.51)
  Top 0.254: v25.91,38.1 v35.43,38.1
  Bottom 0.254: JP4.4 v25.91,38.1 | v35.43,38.1 35.43,29.21 34.8,28.57 32.89,28.57 32.26,27.94 32.26,20.09 JP6.6
AS2_AN3  (via drill 0.51)
  Top 0.254: v102.11,38.1 v111.63,38.1
  Bottom 0.254: JP13.4 v102.11,38.1 | v111.63,38.1 111.63,29.21 111,28.57 109.09,28.57 108.46,27.94 108.46,20.09 JP18.6
AS2_AN4  (via drill 0.51)
  Top 0.254: v117.35,37.47 117.35,60.96 117.98,61.59 v118.62,61.59
  Bottom 0.254: v118.62,61.59 130.05,61.59 130.68,62.23 R28.1 | JP18.1 116.08,26.04 117.35,27.3 v117.35,37.47
AS2_AN5  (via drill 0.51)
  Top 0.254: v25.91,116.84 v35.43,116.84
  Bottom 0.254: JP24.4 v25.91,116.84 | v35.43,116.84 35.43,107.95 34.8,107.31 32.89,107.31 32.26,106.68 32.26,98.83 JP29.6
AS2_AN6  (via drill 0.51)
  Top 0.254: v41.15,116.2 41.15,139.7 41.78,140.34 v42.42,140.34
  Bottom 0.254: v42.42,140.34 53.85,140.34 54.48,140.97 R48.1 | JP29.1 39.88,104.78 41.15,106.05 v41.15,116.2
AS2_AN7  (via drill 0.51)
  Top 0.254: v102.11,116.84 v111.63,116.84
  Bottom 0.254: JP35.4 v102.11,116.84 | v111.63,116.84 111.63,107.95 111,107.31 109.09,107.31 108.46,106.68 108.46,98.83 JP40.6
AS2_AN8  (via drill 0.51)
  Top 0.254: v117.35,116.2 117.35,139.7 117.98,140.34 v118.62,140.34
  Bottom 0.254: v118.62,140.34 130.05,140.34 130.68,140.97 R68.1 | JP40.1 116.08,104.78 117.35,106.05 v117.35,116.2
AS2_AUTOID  (via drill 0.51)
  Top 0.254: v49.4,52.07 48.77,51.44 48.77,28.57 48.13,27.94 44.96,27.94 44.32,27.3 44.32,18.41 43.69,17.78 36.07,17.78 35.43,18.41 35.43,19.91 JP6.4
  Bottom 0.254: R15.2 v49.4,52.07 U1.14
AS2_AUTOID1  (via drill 0.51)
  Top 0.254: v125.6,52.07 124.97,51.44 124.97,28.57 124.33,27.94 121.16,27.94 120.52,27.3 120.52,18.41 119.89,17.78 112.27,17.78 111.63,18.41 111.63,19.91 JP18.4
  Bottom 0.254: R36.2 v125.6,52.07 U3.14
AS2_AUTOID2  (via drill 0.51)
  Top 0.254: v49.4,130.81 48.77,130.18 48.77,107.31 48.13,106.68 44.96,106.68 44.32,106.05 44.32,97.16 43.69,96.52 36.07,96.52 35.43,97.16 35.43,98.66 JP29.4
  Bottom 0.254: R56.2 v49.4,130.81 U5.14
AS2_AUTOID3  (via drill 0.51)
  Top 0.254: v125.6,130.81 124.97,130.18 124.97,107.31 124.33,106.68 121.16,106.68 120.52,106.05 120.52,97.16 119.89,96.52 112.27,96.52 111.63,97.16 111.63,98.66 JP40.4
  Bottom 0.254: R76.2 v125.6,130.81 U7.14
AS2_VRES
  Bottom 0.254: JP6.3 36.88,26.62 36.83,26.67 | U1.5 38.61,54.61 37.97,53.98 37.97,27.3 37.34,26.67 36.83,26.67 | 36.83,26.67 R16.2
AS2_VRES1
  Bottom 0.254: JP18.3 113.08,26.62 113.03,26.67 | U3.5 114.81,54.61 114.17,53.98 114.17,27.3 113.54,26.67 113.03,26.67 | 113.03,26.67 R34.2
AS2_VRES2
  Bottom 0.254: JP29.3 36.88,105.36 36.83,105.41 | U5.5 38.61,133.35 37.97,132.72 37.97,106.05 37.34,105.41 36.83,105.41 | 36.83,105.41 R54.2
AS2_VRES3
  Bottom 0.254: JP40.3 113.08,105.36 113.03,105.41 | U7.5 114.81,133.35 114.17,132.72 114.17,106.05 113.54,105.41 113.03,105.41 | 113.03,105.41 R74.2
D1_IO1
  Bottom 0.254: JP2.3 48.77,35.56 47.5,34.29 47.5,21.9 JP7.1
D1_IO2  (via drill 0.51)
  Top 0.254: v50.73,37.47 JP7.2
  Bottom 0.254: U1.2 41.78,50.8 42.36,50.23 42.36,38.48 43.38,37.47 v50.73,37.47 63.37,37.47 64.01,38.1 JP2.4
D1_IO3  (via drill 0.51)
  Top 0.254: v50.67,48.26 54.48,48.26 55.12,47.62 v55.12,38.73 55.12,29.84 55.75,29.21 v59.56,29.21
  Bottom 0.254: U1.15 R17.2 51.09,49.31 50.67,48.9 v50.67,48.26 | v55.12,38.73 62.1,38.73 64.01,40.64 JP2.5 | JP7.3 52.58,19.82 52.58,17.78 53.21,17.14 58.29,17.14 59.56,18.41 v59.56,29.21
D1_IO4  (via drill 0.51)
  Top 0.254: v61.47,43.18 v61.47,33.66
  Bottom 0.254: v61.47,43.18 JP2.6 | JP7.6 57.02,23.07 57.02,32.38 58.29,33.66 v61.47,33.66
D1_IO5  (via drill 0.51)
  Top 0.254: v137.67,43.18 v137.67,33.66
  Bottom 0.254: v137.67,43.18 JP15.6 | JP16.6 133.22,23.07 133.22,32.38 134.49,33.66 v137.67,33.66
D1_IO6  (via drill 0.51)
  Top 0.254: v126.87,48.26 130.68,48.26 131.32,47.62 v131.32,38.73 131.32,29.84 131.95,29.21 v135.76,29.21
  Bottom 0.254: U3.15 R37.2 127.29,49.31 126.87,48.9 v126.87,48.26 | v131.32,38.73 138.3,38.73 140.21,40.64 JP15.5 | JP16.3 128.78,19.82 128.78,17.78 129.41,17.14 134.49,17.14 135.76,18.41 v135.76,29.21
D1_IO7  (via drill 0.51)
  Top 0.254: v126.93,37.47 JP16.2
  Bottom 0.254: U3.2 117.98,50.8 118.56,50.23 118.56,38.48 119.58,37.47 v126.93,37.47 139.57,37.47 140.21,38.1 JP15.4
D1_IO8
  Bottom 0.254: JP15.3 124.97,35.56 123.7,34.29 123.7,21.9 JP16.1
D1_IO9  (via drill 0.51)
  Top 0.254: v61.47,121.92 v61.47,112.39
  Bottom 0.254: v61.47,121.92 JP26.6 | JP27.6 57.02,101.81 57.02,111.12 58.29,112.39 v61.47,112.39
D1_IO10  (via drill 0.51)
  Top 0.254: v50.67,127 54.48,127 55.12,126.36 v55.12,117.47 55.12,108.58 55.75,107.95 v59.56,107.95
  Bottom 0.254: U5.15 R57.2 51.09,128.06 50.67,127.64 v50.67,127 | v55.12,117.47 62.1,117.47 64.01,119.38 JP26.5 | JP27.3 52.58,98.56 52.58,96.52 53.21,95.89 58.29,95.89 59.56,97.16 v59.56,107.95
D1_IO11  (via drill 0.51)
  Top 0.254: v50.73,116.2 JP27.2
  Bottom 0.254: U5.2 41.78,129.54 42.36,128.97 42.36,117.22 43.38,116.2 v50.73,116.2 63.37,116.2 64.01,116.84 JP26.4
D1_IO12
  Bottom 0.254: JP26.3 48.77,114.3 47.5,113.03 47.5,100.64 JP27.1
D1_IO13  (via drill 0.51)
  Top 0.254: v137.67,121.92 v137.67,112.39
  Bottom 0.254: v137.67,121.92 JP37.6 | JP38.6 133.22,101.81 133.22,111.12 134.49,112.39 v137.67,112.39
D1_IO14  (via drill 0.51)
  Top 0.254: v126.87,127 130.68,127 131.32,126.36 v131.32,117.47 131.32,108.58 131.95,107.95 v135.76,107.95
  Bottom 0.254: U7.15 R77.2 127.29,128.06 126.87,127.64 v126.87,127 | v131.32,117.47 138.3,117.47 140.21,119.38 JP37.5 | JP38.3 128.78,98.56 128.78,96.52 129.41,95.89 134.49,95.89 135.76,97.16 v135.76,107.95
D1_IO15  (via drill 0.51)
  Top 0.254: v126.93,116.2 JP38.2
  Bottom 0.254: U7.2 117.98,129.54 118.56,128.97 118.56,117.22 119.58,116.2 v126.93,116.2 139.57,116.2 140.21,116.84 JP37.4
D1_IO16
  Bottom 0.254: JP37.3 124.97,114.3 123.7,113.03 123.7,100.64 JP38.1
D2_IO1  (via drill 0.51)
  Top 0.254: v61.47,45.72 58.29,45.72 57.02,44.45 57.02,31.75 57.66,31.11 60.83,31.11 61.47,30.48 v61.47,28.57
  Bottom 0.254: JP2.7 v61.47,45.72 | v61.47,28.57 61.47,21.59 62.74,20.32 67.49,20.32 JP8.1
D2_IO2  (via drill 0.51, 0.6)
  Top 0.254: v43.69,46.35 v43.69,52.7 | v61.47,48.26 67.82,48.26 68.45,47.62 68.45,29.21 v67.82,28.57
  Bottom 0.254: v43.69,46.35 43.69,43.81 44.32,43.18 58.93,43.18 59.56,43.81 59.56,47.62 60.2,48.26 v61.47,48.26 JP2.8 | v43.69,52.7 43.05,53.34 U1.4 | 69.03,22.86 JP8.2 67.82,24.3 v67.82,28.57
D2_IO3  (via drill 0.51)
  Top 0.254: v54.48,58.42 57.66,58.42 58.29,57.78 58.29,52.7 58.93,52.07 v62.74,52.07 69.72,52.07 70.99,50.8 70.99,28.57 72.9,26.67 76.71,26.67 77.98,25.4 77.98,19.05 76.71,17.78 71.63,17.78 70.84,18.57 JP8.3
  Bottom 0.254: U1.11 R18.2 51.09,57.57 51.94,58.42 v54.48,58.42 | JP1.1 v62.74,52.07
D2_IO4  (via drill 0.51)
  Top 0.254: JP8.6 75.34,24.77 74.71,25.4 72.9,25.4 69.72,28.57 69.72,49.53 69.09,50.16 v62.74,50.16
  Bottom 0.254: JP1.2 61.47,54.61 60.83,53.98 60.83,50.8 61.47,50.16 v62.74,50.16
D2_IO5  (via drill 0.51)
  Top 0.254: JP19.6 151.54,24.77 150.91,25.4 149.1,25.4 145.92,28.57 145.92,49.53 145.29,50.16 v138.94,50.16
  Bottom 0.254: JP12.2 137.67,54.61 137.03,53.98 137.03,50.8 137.67,50.16 v138.94,50.16
D2_IO6  (via drill 0.51)
  Top 0.254: v130.68,58.42 133.86,58.42 134.49,57.78 134.49,52.7 135.13,52.07 v138.94,52.07 145.92,52.07 147.19,50.8 147.19,28.57 149.1,26.67 152.91,26.67 154.18,25.4 154.18,19.05 152.91,17.78 147.83,17.78 147.04,18.57 JP19.3
  Bottom 0.254: U3.11 R38.2 127.29,57.57 128.14,58.42 v130.68,58.42 | JP12.1 v138.94,52.07
D2_IO7  (via drill 0.51, 0.6)
  Top 0.254: v119.89,46.35 v119.89,52.7 | v137.67,48.26 144.02,48.26 144.65,47.62 144.65,29.21 v144.02,28.57
  Bottom 0.254: v119.89,46.35 119.89,43.81 120.52,43.18 135.13,43.18 135.76,43.81 135.76,47.62 136.4,48.26 v137.67,48.26 JP15.8 | v119.89,52.7 119.25,53.34 U3.4 | 145.23,22.86 JP19.2 144.02,24.3 v144.02,28.57
D2_IO8  (via drill 0.51)
  Top 0.254: v137.67,45.72 134.49,45.72 133.22,44.45 133.22,31.75 133.86,31.11 137.03,31.11 137.67,30.48 v137.67,28.57
  Bottom 0.254: JP15.7 v137.67,45.72 | v137.67,28.57 137.67,21.59 138.94,20.32 143.69,20.32 JP19.1
D2_IO9  (via drill 0.51)
  Top 0.254: JP30.6 75.34,103.5 74.71,104.14 72.9,104.14 69.72,107.31 69.72,128.27 69.09,128.91 v62.74,128.91
  Bottom 0.254: JP23.2 61.47,133.35 60.83,132.72 60.83,129.54 61.47,128.91 v62.74,128.91
D2_IO10  (via drill 0.51)
  Top 0.254: v54.48,137.16 57.66,137.16 58.29,136.53 58.29,131.44 58.93,130.81 v62.74,130.81 69.72,130.81 70.99,129.54 70.99,107.31 72.9,105.41 76.71,105.41 77.98,104.14 77.98,97.79 76.71,96.52 71.63,96.52 70.84,97.31 JP30.3
  Bottom 0.254: U5.11 R58.2 51.09,136.31 51.94,137.16 v54.48,137.16 | JP23.1 v62.74,130.81
D2_IO11  (via drill 0.51, 0.6)
  Top 0.254: v43.69,125.09 v43.69,131.44 | v61.47,127 67.82,127 68.45,126.36 68.45,107.95 v67.82,107.31
  Bottom 0.254: v43.69,125.09 43.69,122.56 44.32,121.92 58.93,121.92 59.56,122.56 59.56,126.36 60.2,127 v61.47,127 JP26.8 | v43.69,131.44 43.05,132.08 U5.4 | 69.03,101.6 JP30.2 67.82,103.03 v67.82,107.31
D2_IO12  (via drill 0.51)
  Top 0.254: v61.47,124.46 58.29,124.46 57.02,123.19 57.02,110.49 57.66,109.86 60.83,109.86 61.47,109.22 v61.47,107.31
  Bottom 0.254: JP26.7 v61.47,124.46 | v61.47,107.31 61.47,100.33 62.74,99.06 67.49,99.06 JP30.1
D2_IO13  (via drill 0.51)
  Top 0.254: JP41.6 151.54,103.5 150.91,104.14 149.1,104.14 145.92,107.31 145.92,128.27 145.29,128.91 v138.94,128.91
  Bottom 0.254: JP34.2 137.67,133.35 137.03,132.72 137.03,129.54 137.67,128.91 v138.94,128.91
D2_IO14  (via drill 0.51)
  Top 0.254: v130.68,137.16 133.86,137.16 134.49,136.53 134.49,131.44 135.13,130.81 v138.94,130.81 145.92,130.81 147.19,129.54 147.19,107.31 149.1,105.41 152.91,105.41 154.18,104.14 154.18,97.79 152.91,96.52 147.83,96.52 147.04,97.31 JP41.3
  Bottom 0.254: U7.11 R78.2 127.29,136.31 128.14,137.16 v130.68,137.16 | JP34.1 v138.94,130.81
D2_IO15  (via drill 0.51, 0.6)
  Top 0.254: v119.89,125.09 v119.89,131.44 | v137.67,127 144.02,127 144.65,126.36 144.65,107.95 v144.02,107.31
  Bottom 0.254: v119.89,125.09 119.89,122.56 120.52,121.92 135.13,121.92 135.76,122.56 135.76,126.36 136.4,127 v137.67,127 JP37.8 | v119.89,131.44 119.25,132.08 U7.4 | 145.23,101.6 JP41.2 144.02,103.03 v144.02,107.31
D2_IO16  (via drill 0.51)
  Top 0.254: v137.67,124.46 134.49,124.46 133.22,123.19 133.22,110.49 133.86,109.86 137.03,109.86 137.67,109.22 v137.67,107.31
  Bottom 0.254: JP37.7 v137.67,124.46 | v137.67,107.31 137.67,100.33 138.94,99.06 143.69,99.06 JP41.1
GND  (via drill 0.51)
  other vias: 44.96,44.45 50.04,67.31 37.97,60.96
  pour Bottom (isolate 0.305): 17.65,82.55 20.19,85.09 69.47,85.09 69.72,85.06 72.26,82.52 72.26,29.21 73.53,27.94 81.15,27.94 82.42,26.67 82.42,8.26 81.15,6.99 8.13,6.99 6.99,8.13 6.86,8.13 6.86,26.29 8.76,27.94 16.38,27.94 17.65,29.21
  pour Top (isolate 0.305): 17.65,82.55 20.19,85.09 69.72,85.09 72.26,82.55 72.26,29.21 73.53,27.94 81.15,27.94 82.42,26.67 82.42,8.26 81.15,6.99 8.13,6.99 8.28,7.01 8.13,7.01 6.86,8.15 6.86,26.26 8.76,27.94 16.38,27.94 17.65,29.21
GND1  (via drill 0.51)
  other vias: 121.16,44.45 126.24,67.31 114.17,60.96
  pour Bottom (isolate 0.305): 93.85,82.55 96.39,85.09 145.67,85.09 145.92,85.06 148.46,82.52 148.46,29.21 149.73,27.94 157.35,27.94 158.62,26.67 158.62,8.26 157.35,6.99 84.33,6.99 83.19,8.13 83.06,8.13 83.06,26.29 84.96,27.94 92.58,27.94 93.85,29.21
  pour Top (isolate 0.305): 93.85,82.55 96.39,85.09 145.92,85.09 148.46,82.55 148.46,29.21 149.73,27.94 157.35,27.94 158.62,26.67 158.62,8.26 157.35,6.99 84.33,6.99 84.48,7.01 84.33,7.01 83.06,8.15 83.06,26.26 84.96,27.94 92.58,27.94 93.85,29.21
GND2  (via drill 0.51)
  other vias: 44.96,123.19 50.04,146.05 37.97,139.7
  pour Bottom (isolate 0.305): 17.65,161.29 20.19,163.83 69.47,163.83 69.72,163.8 72.26,161.26 72.26,107.95 73.53,106.68 81.15,106.68 82.42,105.41 82.42,87 81.15,85.72 8.13,85.72 6.99,86.87 6.86,86.87 6.86,105.03 8.76,106.68 16.38,106.68 17.65,107.95
  pour Top (isolate 0.305): 17.65,161.29 20.19,163.83 69.72,163.83 72.26,161.29 72.26,107.95 73.53,106.68 81.15,106.68 82.42,105.41 82.42,87 81.15,85.72 8.13,85.72 8.28,85.75 8.13,85.75 6.86,86.89 6.86,105 8.76,106.68 16.38,106.68 17.65,107.95
GND3  (via drill 0.51)
  other vias: 121.16,123.19 126.24,146.05 114.17,139.7
  pour Bottom (isolate 0.305): 93.85,161.29 96.39,163.83 145.67,163.83 145.92,163.8 148.46,161.26 148.46,107.95 149.73,106.68 157.35,106.68 158.62,105.41 158.62,87 157.35,85.72 84.33,85.72 83.19,86.87 83.06,86.87 83.06,105.03 84.96,106.68 92.58,106.68 93.85,107.95
  pour Top (isolate 0.305): 93.85,161.29 96.39,163.83 145.92,163.83 148.46,161.29 148.46,107.95 149.73,106.68 157.35,106.68 158.62,105.41 158.62,87 157.35,85.72 84.33,85.72 84.48,85.75 84.33,85.75 83.06,86.89 83.06,105 84.96,106.68 92.58,106.68 93.85,107.95
MUX_A0
  Bottom 0.254: U1.10 48.77,57.15 49.4,57.78 49.4,59.05 50.04,59.69 61.47,59.69 62.1,59.05 62.1,57.78 62.74,57.15 JP1.3
MUX_A1
  Bottom 0.254: U1.9 47.5,58.42 48.13,59.05 48.13,59.69 48.77,60.33 62.74,60.33 63.37,59.69 JP1.4
MUX_A2
  Bottom 0.254: U3.10 124.97,57.15 125.6,57.78 125.6,59.05 126.24,59.69 137.67,59.69 138.3,59.05 138.3,57.78 138.94,57.15 JP12.3
MUX_A3
  Bottom 0.254: U3.9 123.7,58.42 124.33,59.05 124.33,59.69 124.97,60.33 138.94,60.33 139.57,59.69 JP12.4
MUX_A4
  Bottom 0.254: U5.10 48.77,135.89 49.4,136.53 49.4,137.79 50.04,138.43 61.47,138.43 62.1,137.79 62.1,136.53 62.74,135.89 JP23.3
MUX_A5
  Bottom 0.254: U5.9 47.5,137.16 48.13,137.79 48.13,138.43 48.77,139.06 62.74,139.06 63.37,138.43 JP23.4
MUX_A6
  Bottom 0.254: U7.10 124.97,135.89 125.6,136.53 125.6,137.79 126.24,138.43 137.67,138.43 138.3,137.79 138.3,136.53 138.94,135.89 JP34.3
MUX_A7
  Bottom 0.254: U7.9 123.7,137.16 124.33,137.79 124.33,138.43 124.97,139.06 138.94,139.06 139.57,138.43 JP34.4
N$1
  Bottom 0.254: R2.2 R6.1 R1.2 33.11,69.43 34.8,71.12 37.34,71.12 37.97,70.48 U2.3
N$2
  Bottom 0.254: R4.1 R3.2
N$3
  Bottom 0.254: R4.2 R5.1 38.39,69.43 38.61,69.22 U2.2
N$4
  Bottom 0.254: R24.1 R23.2
N$5
  Bottom 0.254: R9.2 R10.1
N$6
  Bottom 0.254: U2.5 47.5,71.75 48.77,73.03 53.85,73.03 54.48,72.39 R8.2 R12.1 R7.2
N$8
  Bottom 0.254: U2.6 47.5,70.48 47.71,70.7 R11.1 R10.2
N$9
  Bottom 0.254: R19.2 59.98,79.16 LED1.K
N$24
  Bottom 0.254: R22.2 R26.1 R21.2 109.31,69.43 111,71.12 113.54,71.12 114.17,70.48 U4.3
N$25
  Bottom 0.254: R24.2 R25.1 114.59,69.43 114.81,69.22 U4.2
N$26
  Bottom 0.254: R29.2 R30.1
N$28
  Bottom 0.254: U4.5 123.7,71.75 124.97,73.03 130.05,73.03 130.68,72.39 R28.2 R32.1 R27.2
N$29
  Bottom 0.254: U4.6 123.7,70.48 123.91,70.7 R31.1 R30.2
N$30
  Bottom 0.254: R39.2 136.18,79.16 LED2.K
N$31
  Bottom 0.254: R44.1 R43.2
N$32
  Bottom 0.254: R42.2 R46.1 R41.2 33.11,148.17 34.8,149.86 37.34,149.86 37.97,149.22 U6.3
N$33
  Bottom 0.254: R44.2 R45.1 38.39,148.17 38.61,147.96 U6.2
N$34
  Bottom 0.254: R49.2 R50.1
N$35
  Bottom 0.254: U6.5 47.5,150.5 48.77,151.76 53.85,151.76 54.48,151.13 R48.2 R52.1 R47.2
N$36
  Bottom 0.254: U6.6 47.5,149.22 47.71,149.44 R51.1 R50.2
N$37
  Bottom 0.254: R59.2 59.98,157.9 LED3.K
N$38
  Bottom 0.254: R64.1 R63.2
N$39
  Bottom 0.254: R62.2 R66.1 R61.2 109.31,148.17 111,149.86 113.54,149.86 114.17,149.22 U8.3
N$40
  Bottom 0.254: R64.2 R65.1 114.59,148.17 114.81,147.96 U8.2
N$41
  Bottom 0.254: R69.2 R70.1
N$42
  Bottom 0.254: U8.5 123.7,150.5 124.97,151.76 130.05,151.76 130.68,151.13 R68.2 R72.1 R67.2
N$43
  Bottom 0.254: U8.6 123.7,149.22 123.91,149.44 R71.1 R70.2
N$44
  Bottom 0.254: R79.2 136.18,157.9 LED4.K
RESET
  Bottom 0.254: JP3.6 24.64,60.96 25.27,61.59 25.27,68.58 24,69.85 24,74.2 24.5,74.7 25.17,74.7 | R20.1 25.17,74.7 | S2.3 25.25,74.78 25.17,74.7
RESET1
  Bottom 0.254: JP14.6 100.84,60.96 101.47,61.59 101.47,68.58 100.2,69.85 100.2,74.2 100.7,74.7 101.37,74.7 | R40.1 101.37,74.7 | S4.3 101.45,74.78 101.37,74.7
RESET2
  Bottom 0.254: JP25.6 24.64,139.7 25.27,140.34 25.27,147.32 24,148.59 24,152.94 24.5,153.44 25.17,153.44 | R60.1 25.17,153.44 | S6.3 25.25,153.51 25.17,153.44
RESET3
  Bottom 0.254: JP36.6 100.84,139.7 101.47,140.34 101.47,147.32 100.2,148.59 100.2,152.94 100.7,153.44 101.37,153.44 | R80.1 101.37,153.44 | S8.3 101.45,153.51 101.37,153.44

## Text on the board
Bottom: v10 | v10 | v10 | v10
Dimension: Route Out | Route Out | Route Out | Route Out | Route Out | Route Out | Route Out | Route Out | Route Out | Route Out | Route Out | Route Out
tPlace: RESET | D12 | D13 | RESET | D12 | D13 | Arduino to Vernier Pin-out | Arduino to Vernier Pin-out | GND | GND | D13 | D13 | D12 | D12 | Vernier Sensor / Interface Shield | Vernier Sensor / Interface Shield | 5V | 5V | ANALOG 1 / MUX ADDR 00 / 0-5V / +/-10V / V_RES / IDEN | -> A0 / -> A1 / -> A4 / -> A5 | DIGITAL 1 / MUX ADDR 10 / IO1 -> D2 / IO2 -> D3/A4 / IO3 -> D4/A5 / IO4 -> D5 | ANALOG 1 / MUX ADDR 00 / 0-5V / +/-10V / V_RES / IDEN | -> A0 / -> A1 / -> A4 / -> A5 | DIGITAL 1 / MUX ADDR 10 / IO1 -> D2 / IO2 -> D3/A4 / IO3 -> D4/A5 / IO4 -> D5 | GND | GND | GND | GND | A0 | A0 | A1 | A1 | ANALOG 2 / MUX ADDR 01 / 0-5V / +/-10V / V_RES / IDEN | -> A2 / -> A3 / -> A4 / -> A5 | DIGITAL 2 / MUX ADDR 11 / IO1 -> D6 / IO2 -> D7/A4 / IO3 -> D8/A5 / IO4 -> D9 | ANALOG 2 / MUX ADDR 01 / 0-5V / +/-10V / V_RES / IDEN | -> A2 / -> A3 / -> A4 / -> A5 | DIGITAL 2 / MUX ADDR 11 / IO1 -> D6 / IO2 -> D7/A4 / IO3 -> D8/A5 / IO4 -> D9 | A2 | A2 | A3 | A3 | A4 | D1 | A4 | D1 | A5 | D0 | A5 | D0 | MUX ADDR PINS / LSB -> D10 / MSB -> D11 | MUX ADDR PINS / LSB -> D10 / MSB -> D11 | ANALOG 1 | ANALOG 2 | DIGITAL 1 | DIGITAL 2 | ANALOG 1 | ANALOG 2 | DIGITAL 1 | DIGITAL 2 | RESET | D12 | D13 | RESET | D12 | D13 | Arduino to Vernier Pin-out | Arduino to Vernier Pin-out | GND | GND | D13 | D13 | D12 | D12 | Vernier Sensor / Interface Shield | Vernier Sensor / Interface Shield | 5V | 5V | ANALOG 1 / MUX ADDR 00 / 0-5V / +/-10V / V_RES / IDEN | -> A0 / -> A1 / -> A4 / -> A5 | DIGITAL 1 / MUX ADDR 10 / IO1 -> D2 / IO2 -> D3/A4 / IO3 -> D4/A5 / IO4 -> D5 | ANALOG 1 / MUX ADDR 00 / 0-5V / +/-10V / V_RES / IDEN | -> A0 / -> A1 / -> A4 / -> A5 | DIGITAL 1 / MUX ADDR 10 / IO1 -> D2 / IO2 -> D3/A4 / IO3 -> D4/A5 / IO4 -> D5 | GND | GND | GND | GND | A0 | A0 | A1 | A1 | ANALOG 2 / MUX ADDR 01 / 0-5V / +/-10V / V_RES / IDEN | -> A2 / -> A3 / -> A4 / -> A5 | DIGITAL 2 / MUX ADDR 11 / IO1 -> D6 / IO2 -> D7/A4 / IO3 -> D8/A5 / IO4 -> D9 | ANALOG 2 / MUX ADDR 01 / 0-5V / +/-10V / V_RES / IDEN | -> A2 / -> A3 / -> A4 / -> A5 | DIGITAL 2 / MUX ADDR 11 / IO1 -> D6 / IO2 -> D7/A4 / IO3 -> D8/A5 / IO4 -> D9 | A2 | A2 | A3 | A3 | A4 | D1 | A4 | D1 | A5 | D0 | A5 | D0 | MUX ADDR PINS / LSB -> D10 / MSB -> D11 | MUX ADDR PINS / LSB -> D10 / MSB -> D11 | ANALOG 1 | ANALOG 2 | DIGITAL 1 | DIGITAL 2 | ANALOG 1 | ANALOG 2 | DIGITAL 1 | DIGITAL 2
bPlace: SCL | SCL | SDA | SDA | AREF | AREF | GND | GND | D13 | D13 | IOREF | IOREF | D12 | D12 | RST | RST | D11 | D11 | 3.3V | 3.3V | D10 | D10 | 5V | 5V | D9 | D9 | GND | GND | D8 | D8 | GND | GND | VIN | D7 | VIN | D7 | D6 | D6 | A0 | D5 | A0 | D5 | A1 | D4 | A1 | D4 | A2 | D3 | A2 | D3 | A3 | D2 | A3 | D2 | A4 | D1 | A4 | D1 | A5 | D0 | A5 | D0 | SCL | SCL | SDA | SDA | AREF | AREF | GND | GND | D13 | D13 | IOREF | IOREF | D12 | D12 | RST | RST | D11 | D11 | 3.3V | 3.3V | D10 | D10 | 5V | 5V | D9 | D9 | GND | GND | D8 | D8 | GND | GND | VIN | D7 | VIN | D7 | D6 | D6 | A0 | D5 | A0 | D5 | A1 | D4 | A1 | D4 | A2 | D3 | A2 | D3 | A3 | D2 | A3 | D2 | A4 | D1 | A4 | D1 | A5 | D0 | A5 | D0